# Altium PCB PCB1.PcbDoc (part 2 of 2)
Units mil, origin at the board's own origin, x right, y up, seen from the top; angles counter-clockwise.
Board outline 7474.71 x 6958.47 mil, 4 copper layers (PowerLayer1, PowerLayer2, GndLayer, SignalLayer), stack 30.635 mil thick; 145 components, 77 nets, 394 pads, 59 vias.
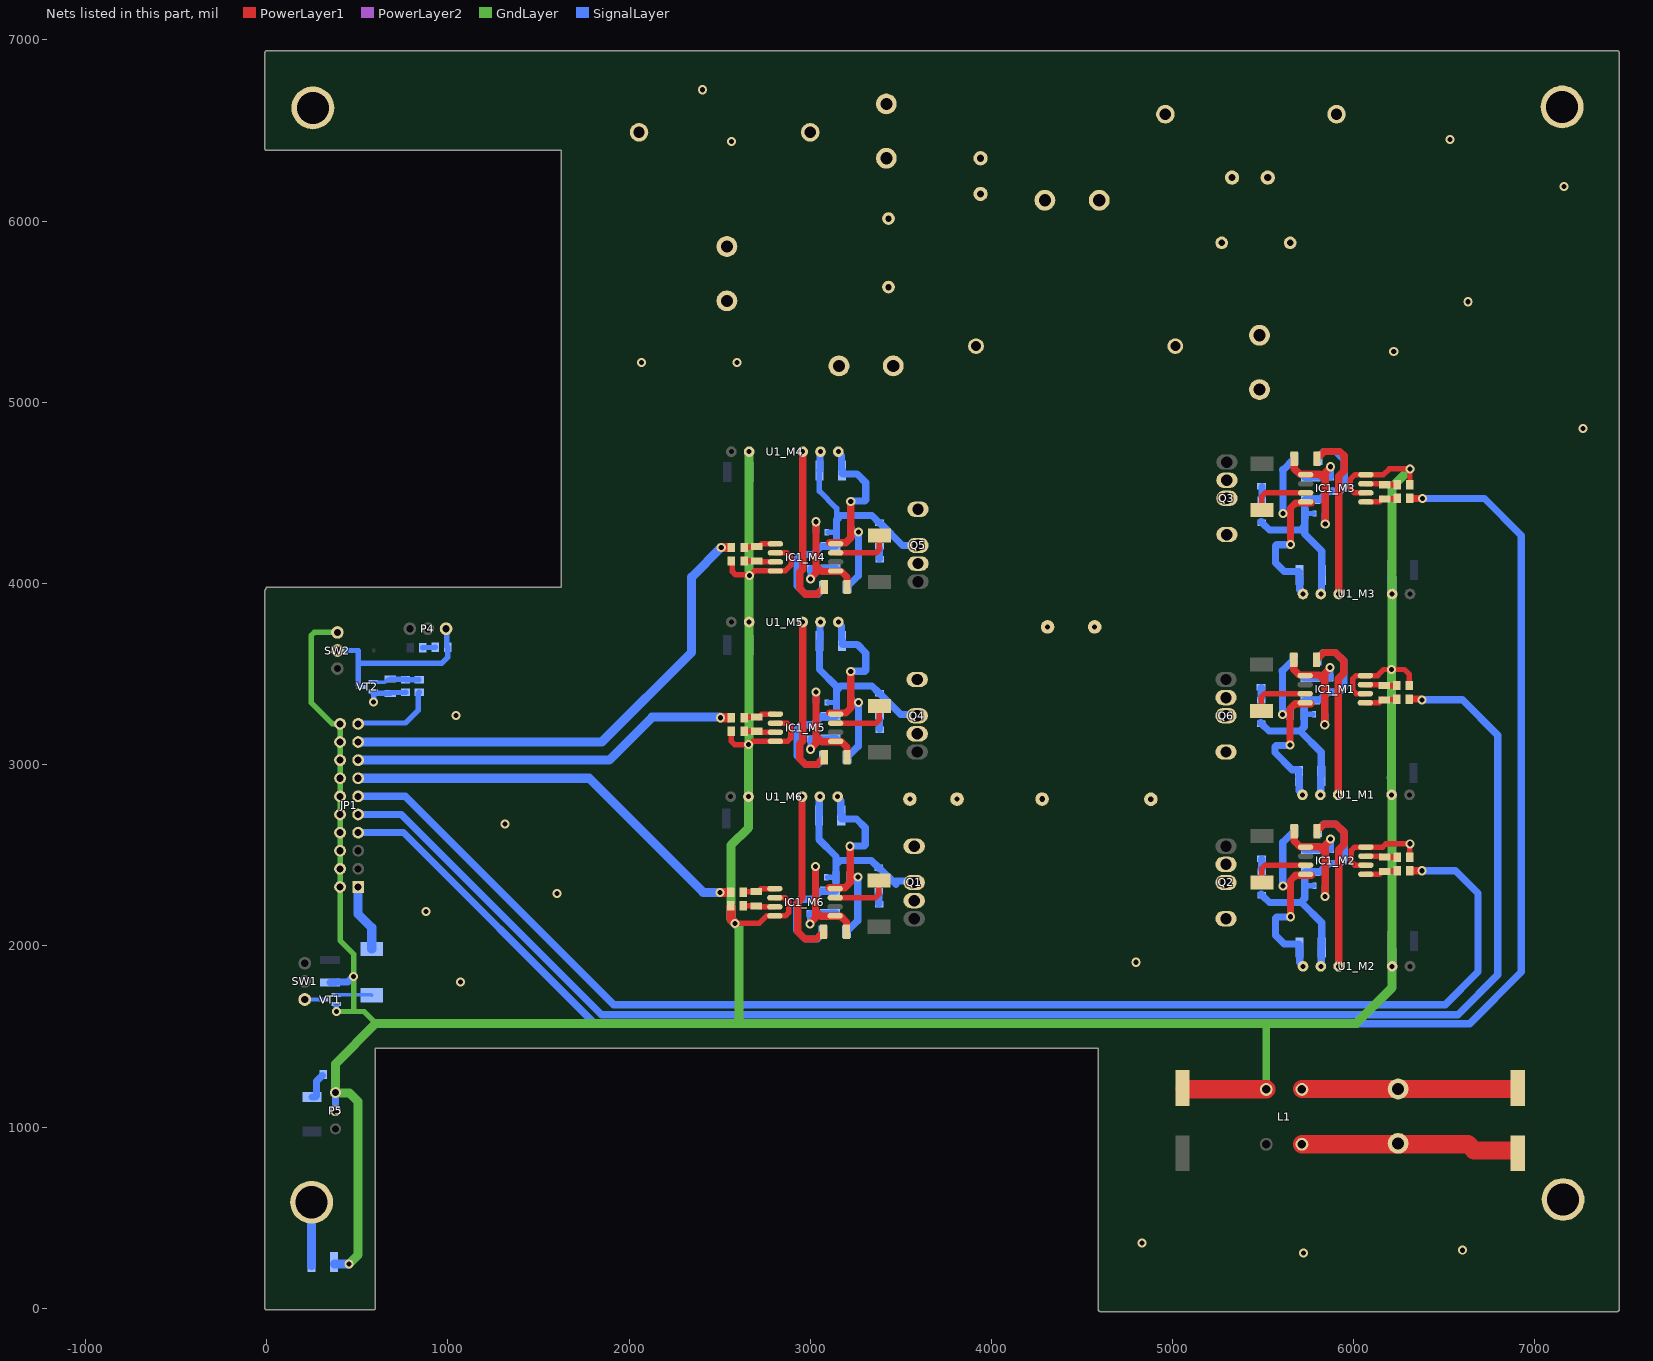
[diagram p4: the nets of this part, all layers, seen from the top]

## Via types
v1: diameter 50, hole 28, PowerLayer1 to SignalLayer, 59 vias

## Nets (pads, with @x,y where several pads share a name; then routed paths per layer and width w, separated by ;. In a path a pad name is that pad's centre, name@x,y a point inside that pad or via, vN(x,y) a via of type N, cw(c..) or ccw(c..) an arc to the next point about the centre after c; other vN are vias at no path point) (continued)
GND: C1.1 C2.2 C4.2 C5.2 C12_M1.2 C12_M2.2 C12_M3.2 C12_M4.2 C12_M5.2 C12_M6.2 IC1_M1.2 IC1_M1.4 IC1_M2.2 IC1_M2.4 IC1_M3.2 IC1_M3.4 IC1_M4.2 IC1_M4.4 IC1_M5.2 IC1_M5.4 IC1_M6.2 IC1_M6.4 JP1.2 JP1.4 JP1.6 JP1.8 JP1.10 JP1.12 JP1.14 JP1.16 JP1.18 JP1.20 L1.3 P5.2 P5.3 R7.1 R11_M1.1 R11_M2.1 R11_M3.1 R11_M4.1 R11_M5.1 R11_M6.1 SW2.3 U1_M1.2 U1_M2.2 U1_M3.2 U1_M4.2 U1_M5.2 U1_M6.2 VD1.2 VT1.3 VT2.3 | length 21396.9
  PowerLayer1 w30: R11_M5.1@2564.8,3184.27 2564.8,3127.83 2582.37,3110.25 v1(2659.54,3110.25) 2664.95,3110.25 2683.65,3128.95 IC1_M5.4@2807.74,3128.95 2874.73,3128.95 2892.3,3146.53 2892.3,3208.78 2872.17,3228.91 2807.78,3228.91 IC1_M5.2@2807.74,3228.95 ; R11_M4.1@2564.8,4124.32 2570.46,4118.65 2570.46,4065.19 2588.04,4047.62 2661.67,4047.62 v1(2665.5,4043.79) 2667.85,4043.79 2693.07,4069.01 2862.08,4069.01 2894.02,4100.94 2894.02,4145.08 2870.13,4168.97 2807.78,4168.97 IC1_M4.2@2807.74,4169.01 ; v1(2584.65,2124.01) 2717.44,2124.01 2758.87,2165.44 2863.51,2165.44 2881.08,2183.01 2881.08,2245.63 2861.31,2265.4 IC1_M6.2@2804.51,2265.44 IC1_M6.2@2804.51,2265.44 ; IC1_M2.2@6066.94,2444.92 6004.68,2444.92 5987.1,2462.49 5987.1,2527.31 6004.68,2544.88 IC1_M2.4@6066.94,2544.92 IC1_M2.4@6066.94,2544.92 6158.78,2544.92 6177.12,2563.25 v1(6310.34,2563.25) 6310.11,2563.03 6310.11,2489.83 R11_M2.1@6309.88,2489.61 ; IC1_M3.2@6067.06,4500.32 6067.02,4500.35 6003.35,4500.35 5979.46,4524.24 5979.46,4572.76 6007.02,4600.32 IC1_M3.4@6067.06,4600.32 6164.05,4600.32 6196.41,4632.68 v1(6310.67,4632.68) 6310.33,4632.35 6310.33,4545.33 R11_M3.1@6310,4545 ; R11_M1.1@6307.21,3436.37 6307.21,3498.02 6280.13,3525.1 6165.02,3525.1 6131.6,3491.68 6012.14,3491.68 5994.56,3474.11 5994.56,3409.3 6012.14,3391.72 IC1_M1.2@6064.23,3391.72 ; IC1_M1.2@6064.23,3391.72 IC1_M1.2@6064.26,3391.68
  PowerLayer1 w50: R11_M6.1@2561.57,2220.76 2561.57,2147.09 v1(2584.65,2124.01)
  PowerLayer1 w100: C4.2@5065.63,1208.15 L1.3@5516.89,1208.15
  GndLayer w30: v1(385.12,1637.57) 480,1637.57 ; SW2.3@390,3730 262.57,3730 245,3712.43 245,3342.57 362.48,3225.09 404.91,3225.09 JP1.20@405,3225 JP1.18@405,3125 JP1.16@405,3025 JP1.14@405,2925 JP1.12@405,2825 JP1.10@405,2725 JP1.8@405,2625 JP1.6@405,2525 JP1.4@405,2425 JP1.2@405,2325 405,2030 480,1955 v1(480,1830) 480,1637.57 ; 603.05,1571.95 537.43,1637.57 480,1637.57
  GndLayer w40: L1.3@5516.89,1207.6 5516.89,1571.95
  GndLayer w50: v1(455,245) 505,295 505,1140 457.49,1187.51 382.49,1187.51 P5.3@380,1190 380,1348.91 603.05,1571.95 2607.66,1571.95 ; U1_M4.2@2662.77,4725.86 U1_M5.2@2662.77,3787.17 2662.77,3113.48 v1(2659.54,3110.25) U1_M6.2@2659.54,2823.66 2659.54,2652.57 2561.63,2554.66 2561.63,2147.03 v1(2584.65,2124.01) 2607.66,2100.99 2607.66,1571.95 ; v1(6310.67,4632.68) 6212.03,4534.04 6212.03,3527.89 v1(6209.23,3525.1) 6209.23,2836.2 6211.97,2833.46 6211.97,1886.76 U1_M2.2@6211.91,1886.7 6211.91,1770 6013.87,1571.95 5516.89,1571.95 2607.66,1571.95
  SignalLayer w30: VT1.3@383.46,1669.88 383.46,1639.23 v1(385.12,1637.57) ; JP1.20@405,3225 JP1.20@409.81,3229.81 ; v1@591.61,3365 VT2.3@591.61,3393.58 ; R7.1@766.54,3399.68 765.15,3398.3 715.61,3398.3 715.57,3398.27 686.22,3398.27 C5.2@681.54,3393.58 VT2.3@591.61,3393.58 ; VT2.3@591.61,3393.58 591.61,3396.73 588.46,3393.58 VT2.3@591.61,3393.58
  SignalLayer w40: C2.2@350,1797.99 382.48,1797.99 385.12,1800.63 447.92,1800.63 477.29,1830 v1(480,1830) ; P5.2@380,1090 P5.3@380,1190 VD1.2@380,1282.2 ; U1_M6.2@2659.54,2823.66 2660.9,2822.29 2660.9,2730.75 C12_M6.2@2662.27,2729.38 ; U1_M5.2@2662.77,3787.17 2664.13,3785.81 2664.13,3694.26 C12_M5.2@2665.5,3692.89 ; U1_M4.2@2662.77,4727.23 2664.13,4725.86 2664.13,4634.31 C12_M4.2@2665.5,4632.95
  SignalLayer w50: C1.1@374.37,245 v1(455,245) ; C12_M1.2@6206.5,2927.74 6207.87,2926.38 6207.87,2834.83 U1_M1.2@6209.23,2833.46 ; C12_M3.2@6209.3,4036.38 6210.66,4035.01 6210.66,3943.46 U1_M3.2@6212.03,3942.1 ; C12_M2.2@6210.55,1979.62 6210.55,1888.07 U1_M2.2@6211.91,1886.7
  other v1: 588.46,3345
MS2: C13_M2.1 C14_M2.1 C16_M2.2 C17_M2.2 D4_M2.1 D6_M2.1 L2.1 Q2.2 Q2.3 Q3.1 R8_M2.2 R12_M2.1 U1_M2.6 | length 1447.1
  SignalLayer w30: C14_M2.1@5729.05,2330.82 R12_M2.1@5775.18,2330.82
  SignalLayer w40: D6_M2.1@5488.66,2281.12 D6_M2.1@5488.66,2284.98 ; D6_M2.1@5496.69,2276.95 5534.25,2239.39 D4_M2.1@5567.68,2239.39 5705.62,2239.39 ; R8_M2.2@5801.31,2632.82 5801.31,2641.68 5832.45,2672.82 5900.6,2672.82 5947.24,2626.19 5947.24,2477.24 5923.81,2453.81 C17_M2.2@5859.73,2453.81 5848.55,2453.81 5848.24,2453.49 5848.24,2442.31 5815.4,2409.48 5765.12,2409.48 C16_M2.2@5762.49,2406.84 5732,2406.84 5729.36,2404.2 5729.36,2331.13 C14_M2.1@5729.05,2330.82 5729.05,2262.82 5705.62,2239.39 ; U1_M2.6@5818.21,1886.7 5821.07,1889.56 5821.07,1987.74 C13_M2.1@5823.71,1990.38 5823.71,2127.19 5711.52,2239.39 5705.62,2239.39
MS3: C7-2.2 C8.2 C9-1.2 C13_M1.1 C13_M3.1 C14_M1.1 C14_M3.1 C16_M1.2 C16_M3.2 C17_M1.2 C17_M3.2 D4_M1.1 D4_M3.1 D6_M1.1 D6_M3.1 P1.1 P2.1 Q3.2 Q3.3 Q5.1 Q6.2 Q6.3 R1.1 R2.1 R8_M1.2 R8_M3.2 R12_M1.1 R12_M3.1 U1_M1.6 U1_M3.6 | length 2901.3
  SignalLayer w30: C14_M1.1@5726.37,3277.58 R12_M1.1@5772.51,3277.58 ; C14_M3.1@5729.16,4386.21 R12_M3.1@5775.3,4386.21
  SignalLayer w40: D6_M1.1@5485.98,3227.88 D6_M1.1@5485.98,3231.74 ; D6_M3.1@5488.78,4336.51 D6_M3.1@5488.78,4340.37 ; D6_M1.1@5494.02,3223.71 5531.57,3186.15 D4_M1.1@5565,3186.15 5702.94,3186.15 ; D6_M3.1@5496.81,4332.34 5534.37,4294.78 D4_M3.1@5567.79,4294.78 5705.73,4294.78 5729.16,4318.21 ; R8_M1.2@5798.63,3579.58 5798.63,3588.44 5829.77,3619.58 5897.93,3619.58 5944.56,3572.95 5944.56,3424 5921.13,3400.57 C17_M1.2@5857.05,3400.57 5845.87,3400.57 5845.56,3400.26 5845.56,3389.07 5812.72,3356.24 5762.45,3356.24 C16_M1.2@5759.81,3353.6 5729.32,3353.6 5726.68,3350.96 5726.68,3277.89 C14_M1.1@5726.37,3277.58 5726.37,3209.58 5702.94,3186.15 ; R8_M3.2@5801.42,4688.22 5801.42,4697.07 5832.56,4728.22 5900.72,4728.22 5947.36,4681.58 5947.36,4532.63 5923.92,4509.2 C17_M3.2@5859.85,4509.2 5848.67,4509.2 5848.35,4508.89 5848.35,4497.71 5815.52,4464.87 5765.24,4464.87 C16_M3.2@5762.6,4462.23 5732.12,4462.23 5729.48,4459.59 5729.48,4386.52 C14_M3.1@5729.16,4386.21 5729.16,4318.21 ; U1_M1.6@5815.53,2833.46 5818.39,2836.32 5818.39,2934.51 C13_M1.1@5821.03,2937.14 5821.03,3068.55 5703.43,3186.15 5702.94,3186.15 ; U1_M3.6@5818.33,3942.1 5821.19,3944.96 5821.19,4043.14 C13_M3.1@5823.82,4045.78 5823.82,4178.76 5729.16,4273.42 5729.16,4318.21
MS5: C6.2 C7.2 C9.2 C13_M4.1 C13_M5.1 C14_M4.1 C14_M5.1 C16_M4.2 C16_M5.2 C17_M4.2 C17_M5.2 D4_M4.1 D4_M5.1 D6_M4.1 D6_M5.1 Q4.2 Q4.3 Q5.2 Q5.3 R8_M4.2 R8_M5.2 R12_M4.1 R12_M5.1 U1_M4.6 U1_M5.6 | length 3441.3
  SignalLayer w30: C13_M4.1@3050.97,4623.55 3050.97,4509.15 3145.63,4414.49 3145.63,4351.11 ; R12_M5.1@3099.5,3343.06 C14_M5.1@3145.63,3343.06 ; R12_M4.1@3099.5,4283.11 C14_M4.1@3145.63,4283.11
  SignalLayer w40: C13_M4.1@3050.97,4623.55 3053.61,4626.18 3053.61,4724.37 U1_M4.6@3056.47,4727.23 ; U1_M5.6@3056.47,3787.17 3053.61,3784.31 3053.61,3686.13 C13_M5.1@3050.97,3683.49 3050.97,3524.67 3145.63,3430.01 3145.63,3411.06 ; R8_M5.2@3073.37,3041.05 3073.37,3032.19 3042.23,3001.05 2974.08,3001.05 2927.44,3047.69 2927.44,3196.63 2950.87,3220.07 C17_M5.2@3014.95,3220.07 3026.13,3220.07 3026.44,3220.38 3026.44,3231.56 3059.28,3264.4 3109.55,3264.4 C16_M5.2@3112.19,3267.04 3142.68,3267.04 3145.32,3269.67 3145.32,3342.74 C14_M5.1@3145.63,3343.06 3145.63,3411.06 ; R8_M4.2@3073.37,3981.11 3073.37,3972.25 3042.23,3941.11 2974.08,3941.11 2927.44,3987.74 2927.44,4136.69 2950.87,4160.12 C17_M4.2@3014.95,4160.12 3026.13,4160.12 3026.44,4160.43 3026.44,4171.62 3059.28,4204.45 3109.55,4204.45 C16_M4.2@3112.19,4207.09 3142.68,4207.09 3145.32,4209.73 3145.32,4282.8 C14_M4.1@3145.63,4283.11 3145.63,4351.11 3169.06,4374.54 D4_M4.1@3307,4374.54 3340.43,4374.54 3382.16,4332.81 3386.02,4332.81 3508.83,4210 Q5.2@3595,4210 ; D6_M5.1@3377.99,3396.93 3340.43,3434.49 D4_M5.1@3307,3434.49 3169.06,3434.49 3145.63,3411.06 ; D6_M5.1@3382,3394.84 3383.93,3394.84 3388.1,3390.67 3388.1,3388.74 3499.5,3277.35 3582.65,3277.35 Q4.2@3590,3270 ; D6_M5.1@3386.02,3388.9 D6_M5.1@3386.02,3392.76
MS6: C13_M6.1 C14_M6.1 C16_M6.2 C17_M6.2 D4_M6.1 D6_M6.1 P-Lf.2 Q1.2 Q1.3 Q4.1 R8_M6.2 R12_M6.1 U1_M6.6 | length 1739.6
  SignalLayer w30: R12_M6.1@3096.27,2379.55 C14_M6.1@3142.4,2379.55 ; Q1.3@3573.78,2245.63 Q1.3@3619.37,2245.63
  SignalLayer w40: U1_M6.6@3053.24,2823.66 3050.38,2820.8 3050.38,2722.62 C13_M6.1@3047.74,2719.98 3047.74,2588.02 3142.4,2493.36 3142.4,2447.54 ; R8_M6.2@3070.15,2077.54 3070.15,2068.68 3039,2037.54 2970.85,2037.54 2924.21,2084.18 2924.21,2233.12 2947.64,2256.55 C17_M6.2@3011.72,2256.55 3022.9,2256.55 3023.21,2256.87 3023.21,2268.05 3056.05,2300.88 3106.33,2300.88 C16_M6.2@3108.96,2303.52 3139.45,2303.52 3142.09,2306.16 3142.09,2379.23 C14_M6.1@3142.4,2379.55 3142.4,2447.54 ; D6_M6.1@3374.76,2433.42 3337.2,2470.97 D4_M6.1@3303.77,2470.97 3165.84,2470.97 3142.4,2447.54 ; D6_M6.1@3378.77,2431.33 3380.7,2431.33 D6_M6.1@3382.79,2429.24 ; D6_M6.1@3382.79,2425.38 D6_M6.1@3382.79,2429.24 ; 3474.05,2337.98 D6_M6.1@3382.79,2429.24 ; 3474.57,2358.14 3565.24,2358.14 Q1.2@3573.78,2349.6
NetC3_1: C3.1 L1.1 P3.1 | length 1170.8
  PowerLayer1 w100: L1.1@5713.74,905 6245,905 6630,905 6665,870 C3.1@6870,870
NetC3_2: C3.2 L1.2 P3.2 | length 1156.3
  PowerLayer1 w100: L1.2@5713.74,1209.96 P3.2@6245,1209.96 C3.2@6870,1209.96
NetC5_1: C5.1 R6.2 R7.2 VT2.1 | length 259.4
  SignalLayer w20: VT2.1@588.46,3455.28 652.68,3455.28 669.72,3472.32 C5.1@681.54,3472.32
  SignalLayer w30: C5.1@681.54,3472.32 682.85,3471 R7.2@766.54,3471 ; R7.2@766.56,3469.71 R6.2@840.19,3469.71
NetC6_1: C6.1 C7.1 C9.1 Q1.1 Q2.1 Q6.1
NetC7-2_1: C7-2.1 P-Lf.1 P-SSR.2
NetC13_M1_2: C13_M1.2 C14_M1.2 D4_M1.2 IC1_M1.8 R8_M1.1 U1_M1.7 | length 1121.6
  PowerLayer1 w40: v1(5648.4,3107.41) 5648.4,3307.91 5676.47,3335.97 IC1_M1.8@5764.07,3335.97
  SignalLayer w40: v1(5605.94,3276.47) 5606.5,3277.03 5647.31,3277.03 5647.63,3277.34 C14_M1.2@5647.63,3277.58 ; v1@5605.94,3279.18 5605.94,3516.9 ; v1(5648.4,3107.41) 5646.49,3105.49 5570.96,3105.49 D4_M1.2@5565,3099.53 5565,3066.52 5659.26,2972.26 5694.38,2972.26 5697.02,2969.62 C13_M1.2@5697.02,2954.19 ; R8_M1.1@5668.63,3579.58 5605.94,3516.9 ; C13_M1.2@5694.85,2934.98 5699.65,2930.17 5699.65,2856.08 5717.11,2838.62 U1_M1.7@5717.11,2833.46 ; 5605.94,3516.9 5605.2,3516.16 5605.2,3519.44 5605.94,3518.7 5605.94,3516.9
NetC13_M2_2: C13_M2.2 C14_M2.2 D4_M2.2 IC1_M2.8 R8_M2.1 U1_M2.7 | length 1148.6
  PowerLayer1 w40: v1(5651.08,2160.65) 5651.08,2361.15 5679.15,2389.21 IC1_M2.8@5766.75,2389.21
  SignalLayer w40: v1(5608.62,2329.71) 5609.17,2330.26 5649.99,2330.26 5650.31,2330.58 C14_M2.2@5650.31,2330.82 ; v1@5608.62,2332.42 5608.62,2570.14 ; v1(5651.08,2160.65) 5649.17,2158.73 5573.64,2158.73 D4_M2.2@5567.68,2152.77 5567.68,2058.24 5615.85,2010.07 5697.05,2010.07 C13_M2.2@5699.69,2007.43 ; R8_M2.1@5671.31,2632.82 5608.62,2570.14 ; C13_M2.2@5697.53,1988.22 5702.33,1983.41 5702.33,1909.31 5719.79,1891.86 U1_M2.7@5719.79,1886.7 ; 5608.62,2570.14 5607.88,2569.4 5607.88,2572.68 5608.62,2571.94 5608.62,2570.14
NetC13_M3_2: C13_M3.2 C14_M3.2 D4_M3.2 IC1_M3.8 R8_M3.1 U1_M3.7 | length 1148.6
  PowerLayer1 w40: v1(5651.2,4216.04) 5651.2,4416.54 5679.26,4444.61 IC1_M3.8@5766.86,4444.61
  SignalLayer w40: v1(5608.74,4385.11) 5609.29,4385.66 5650.11,4385.66 5650.42,4385.97 C14_M3.2@5650.42,4386.21 ; v1@5608.74,4387.81 5608.74,4625.53 ; v1(5651.2,4216.04) 5649.28,4214.13 5573.75,4214.13 D4_M3.2@5567.79,4208.17 5567.79,4113.63 5615.96,4065.46 5697.17,4065.46 C13_M3.2@5699.81,4062.82 ; R8_M3.1@5671.42,4688.22 5608.74,4625.53 ; C13_M3.2@5697.64,4043.61 5702.45,4038.81 5702.45,3964.71 5719.9,3947.25 U1_M3.7@5719.9,3942.1 ; 5608.74,4625.53 5608.74,4627.33 5608,4628.07 5608,4624.79 5608.74,4625.53
NetC13_M4_2: C13_M4.2 C14_M4.2 D4_M4.2 IC1_M4.8 R8_M4.1 U1_M4.7 | length 1148.6
  PowerLayer1 w40: IC1_M4.8@3107.93,4224.72 3195.53,4224.72 3223.6,4252.78 v1(3223.6,4453.28)
  SignalLayer w40: U1_M4.7@3154.89,4727.23 3154.89,4722.07 3172.35,4704.61 3172.35,4630.52 C13_M4.2@3177.15,4625.71 ; C13_M4.2@3174.99,4606.5 3177.62,4603.86 3258.83,4603.86 3307,4555.69 D4_M4.2@3307,4461.16 3301.04,4455.2 3225.51,4455.2 v1(3223.6,4453.28) ; R8_M4.1@3203.37,3981.11 3266.06,4043.79 ; C14_M4.2@3224.37,4283.11 3224.37,4283.35 3224.69,4283.66 3265.51,4283.66 v1(3266.06,4284.22) ; v1@3266.06,4281.51 3266.06,4043.79 ; 3266.06,4043.79 3266.06,4041.99 3266.8,4041.25 3266.8,4044.53 3266.06,4043.79
NetC13_M5_2: C13_M5.2 C14_M5.2 D4_M5.2 IC1_M5.8 R8_M5.1 U1_M5.7 | length 1148.6
  PowerLayer1 w40: IC1_M5.8@3107.93,3284.66 3195.53,3284.66 3223.6,3312.73 v1(3223.6,3513.23)
  SignalLayer w40: U1_M5.7@3154.89,3787.17 3154.89,3782.01 3172.35,3764.56 3172.35,3690.46 C13_M5.2@3177.15,3685.66 ; C13_M5.2@3174.99,3666.44 3177.62,3663.81 3258.83,3663.81 3307,3615.64 D4_M5.2@3307,3521.1 3301.04,3515.14 3225.51,3515.14 v1(3223.6,3513.23) ; R8_M5.1@3203.37,3041.05 3266.06,3103.74 ; C14_M5.2@3224.37,3343.06 3224.37,3343.3 3224.69,3343.61 3265.51,3343.61 v1(3266.06,3344.16) ; v1@3266.06,3341.46 3266.06,3103.74 ; 3266.06,3103.74 3266.8,3104.48 3266.8,3101.2 3266.06,3101.94 3266.06,3103.74
NetC13_M6_2: C13_M6.2 C14_M6.2 D4_M6.2 IC1_M6.8 R8_M6.1 U1_M6.7 | length 1148.6
  PowerLayer1 w40: IC1_M6.8@3104.71,2321.15 3192.3,2321.15 3220.37,2349.21 v1(3220.37,2549.72)
  SignalLayer w40: U1_M6.7@3151.67,2823.66 3151.67,2818.5 3169.12,2801.05 3169.12,2726.95 C13_M6.2@3173.92,2722.15 ; C13_M6.2@3171.76,2702.93 3174.4,2700.29 3255.6,2700.29 3303.77,2652.12 D4_M6.2@3303.77,2557.59 3297.81,2551.63 3222.28,2551.63 v1(3220.37,2549.72) ; R8_M6.1@3200.15,2077.54 3262.83,2140.22 ; C14_M6.2@3221.14,2379.55 3221.14,2379.78 3221.46,2380.1 3262.28,2380.1 v1(3262.83,2380.65) ; v1@3262.83,2377.94 3262.83,2140.22 ; 3262.83,2140.22 3262.83,2138.42 3263.57,2137.68 3263.57,2140.96 3262.83,2140.22
NetC15_M1_1: C15_M1.1 IC1_M1.1 R9_M1.2 | length 166.5
  PowerLayer1 w30: IC1_M1.1@6064.26,3341.68 6139.49,3341.72 C15_M1.1@6155.4,3357.63 ; C15_M1.1@6152,3358.58 C15_M1.1@6154.02,3360.61 ; C15_M1.1@6169.23,3359.66 R9_M1.2@6235.18,3359.66
NetC15_M1_2: C15_M1.2 IC1_M1.3 R11_M1.2 | length 155.8
  PowerLayer1 w30: IC1_M1.3@6064.26,3441.68 C15_M1.2@6150.08,3441.68 ; C15_M1.2@6167.21,3436.37 R11_M1.2@6237.21,3436.37
NetC15_M2_1: C15_M2.1 IC1_M2.1 R9_M2.2 | length 166.5
  PowerLayer1 w30: IC1_M2.1@6066.98,2394.96 6142.17,2394.96 C15_M2.1@6158.07,2410.87 ; C15_M2.1@6154.67,2411.82 C15_M2.1@6156.7,2413.85 ; C15_M2.1@6171.91,2412.89 R9_M2.2@6237.86,2412.89
NetC15_M2_2: C15_M2.2 IC1_M2.3 R11_M2.2 | length 155.8
  PowerLayer1 w30: IC1_M2.3@6066.94,2494.92 C15_M2.2@6152.76,2494.92 ; C15_M2.2@6169.88,2489.61 R11_M2.2@6239.88,2489.61
NetC15_M3_1: C15_M3.1 IC1_M3.1 R9_M3.2 | length 166.5
  PowerLayer1 w30: IC1_M3.1@6067.1,4450.35 6142.28,4450.35 C15_M3.1@6158.19,4466.26 ; C15_M3.1@6154.79,4467.21 C15_M3.1@6156.82,4469.24 ; C15_M3.1@6172.03,4468.29 R9_M3.2@6237.97,4468.29
NetC15_M3_2: C15_M3.2 IC1_M3.3 R11_M3.2 | length 155.8
  PowerLayer1 w30: IC1_M3.3@6067.06,4550.32 C15_M3.2@6152.87,4550.32 ; C15_M3.2@6170,4545 R11_M3.2@6240,4545
NetC15_M4_1: C15_M4.1 IC1_M4.1 R9_M4.2 | length 166.5
  PowerLayer1 w30: R9_M4.2@2636.82,4201.03 C15_M4.1@2702.77,4201.03 ; C15_M4.1@2716.61,4203.06 2732.51,4218.97 IC1_M4.1@2807.74,4219.01 ; C15_M4.1@2717.98,4200.08 C15_M4.1@2720.01,4202.11
NetC15_M4_2: C15_M4.2 IC1_M4.3 R11_M4.2 | length 155.8
  PowerLayer1 w30: R11_M4.2@2634.8,4124.32 C15_M4.2@2704.8,4124.32 ; C15_M4.2@2721.92,4119.01 IC1_M4.3@2807.74,4119.01
NetC15_M5_1: C15_M5.1 IC1_M5.1 R9_M5.2 | length 166.5
  PowerLayer1 w30: R9_M5.2@2636.82,3260.98 C15_M5.1@2702.77,3260.98 ; C15_M5.1@2716.61,3263.01 2732.51,3278.91 IC1_M5.1@2807.7,3278.91 ; C15_M5.1@2717.98,3260.03 C15_M5.1@2720.01,3262.06
NetC15_M5_2: C15_M5.2 IC1_M5.3 R11_M5.2 | length 155.8
  PowerLayer1 w30: R11_M5.2@2634.8,3184.27 C15_M5.2@2704.8,3184.27 ; C15_M5.2@2721.92,3178.95 IC1_M5.3@2807.74,3178.95
NetC15_M6_1: C15_M6.1 IC1_M6.1 R9_M6.2 | length 166.5
  PowerLayer1 w30: R9_M6.2@2633.59,2297.47 C15_M6.1@2699.54,2297.47 ; C15_M6.1@2713.38,2299.5 2729.28,2315.4 IC1_M6.1@2804.51,2315.44 ; C15_M6.1@2714.75,2296.51 C15_M6.1@2716.78,2298.54
NetC15_M6_2: C15_M6.2 IC1_M6.3 R11_M6.2 | length 155.8
  PowerLayer1 w30: R11_M6.2@2631.57,2220.76 C15_M6.2@2701.57,2220.76 ; C15_M6.2@2718.69,2215.44 IC1_M6.3@2804.51,2215.44
NetC16_M1_1: C16_M1.1 C17_M1.1 D3_M1.2 IC1_M1.5 R12_M1.2 | length 847.3
  PowerLayer1 w40: D3_M1.2@5668.63,3579.58 5668.94,3579.27 5668.94,3525.1 5699.9,3494.14 5729.13,3494.14 5809.12,3494.14 5839.65,3463.61 ; v1(5839.65,3220.11) 5839.65,3463.61 ; v1(5869.86,3535.69) 5869.86,3532.98 5839.65,3502.77 5839.65,3463.61
  SignalLayer w25: R12_M1.2@5839.65,3277.58 R12_M1.2@5839.65,3285.69
  SignalLayer w40: C16_M1.1@5724.69,3481.04 5724.69,3480.25 5727.33,3477.62 C16_M1.1@5759.81,3477.62 5761.19,3479 5856.74,3479 C17_M1.1@5857.05,3479.31 5867.63,3479.31 5867.95,3479.63 5867.95,3533.77 v1(5869.86,3535.69) ; v1(5839.65,3220.11) R12_M1.2@5839.65,3277.58
NetC16_M2_1: C16_M2.1 C17_M2.1 D3_M2.2 IC1_M2.5 R12_M2.2 | length 847.3
  PowerLayer1 w40: D3_M2.2@5671.31,2632.82 5671.62,2632.51 5671.62,2578.34 5702.58,2547.38 5731.81,2547.38 5811.8,2547.38 5842.33,2516.85 ; v1(5842.33,2273.35) 5842.33,2516.85 ; v1(5872.54,2588.93) 5872.54,2586.22 5842.33,2556.01 5842.33,2516.85
  SignalLayer w25: R12_M2.2@5842.33,2330.82 R12_M2.2@5842.33,2338.93
  SignalLayer w40: C16_M2.1@5727.37,2534.28 5727.37,2533.49 5730.01,2530.85 C16_M2.1@5762.49,2530.85 5763.87,2532.23 5859.42,2532.23 C17_M2.1@5859.73,2532.55 5870.31,2532.55 5870.62,2532.86 5870.62,2587.01 v1(5872.54,2588.93) ; v1(5842.33,2273.35) R12_M2.2@5842.33,2330.82
NetC16_M3_1: C16_M3.1 C17_M3.1 D3_M3.2 IC1_M3.5 R12_M3.2 | length 847.3
  PowerLayer1 w40: D3_M3.2@5671.42,4688.22 5671.74,4687.9 5671.74,4633.73 5702.69,4602.77 5731.92,4602.77 5811.92,4602.77 5842.45,4572.24 ; v1(5842.45,4328.75) 5842.45,4572.24 ; v1(5872.65,4644.32) 5872.65,4641.61 5842.45,4611.41 5842.45,4572.24
  SignalLayer w25: R12_M3.2@5842.45,4386.21 R12_M3.2@5842.45,4394.32
  SignalLayer w40: C16_M3.1@5727.48,4589.68 5727.48,4588.89 5730.12,4586.25 C16_M3.1@5762.6,4586.25 5763.98,4587.63 5859.53,4587.63 C17_M3.1@5859.85,4587.94 5870.43,4587.94 5870.74,4588.26 5870.74,4642.41 v1(5872.65,4644.32) ; v1(5842.45,4328.75) R12_M3.2@5842.45,4386.21
NetC16_M4_1: C16_M4.1 C17_M4.1 D3_M4.2 IC1_M4.5 R12_M4.2 | length 847.3
  PowerLayer1 w40: v1(3002.14,4025) 3002.14,4027.71 3032.35,4057.92 3032.35,4097.08 ; v1(3032.35,4340.58) 3032.35,4097.08 ; D3_M4.2@3203.37,3981.11 3203.06,3981.42 3203.06,4035.59 3172.1,4066.55 3142.87,4066.55 3062.88,4066.55 3032.35,4097.08
  SignalLayer w25: R12_M4.2@3032.35,4275 R12_M4.2@3032.35,4283.11
  SignalLayer w40: v1(3002.14,4025) 3004.05,4026.92 3004.05,4081.06 3004.37,4081.38 C17_M4.1@3014.95,4081.38 3015.26,4081.69 3110.81,4081.69 C16_M4.1@3112.19,4083.07 3144.67,4083.07 3147.31,4080.44 C16_M4.1@3147.31,4079.65 ; R12_M4.2@3032.35,4283.11 v1(3032.35,4340.58)
NetC16_M5_1: C16_M5.1 C17_M5.1 D3_M5.2 IC1_M5.5 R12_M5.2 | length 847.3
  PowerLayer1 w40: v1(3002.14,3084.95) 3002.14,3087.65 3032.35,3117.86 3032.35,3157.02 ; v1(3032.35,3400.52) 3032.35,3157.02 ; D3_M5.2@3203.37,3041.05 3203.06,3041.37 3203.06,3095.54 3172.1,3126.5 3142.87,3126.5 3062.88,3126.5 3032.35,3157.02
  SignalLayer w25: R12_M5.2@3032.35,3334.95 R12_M5.2@3032.35,3343.06
  SignalLayer w40: v1(3002.14,3084.95) 3004.05,3086.86 3004.05,3141.01 3004.37,3141.33 C17_M5.1@3014.95,3141.33 3015.26,3141.64 3110.81,3141.64 C16_M5.1@3112.19,3143.02 3144.67,3143.02 3147.31,3140.38 C16_M5.1@3147.31,3139.59 ; R12_M5.2@3032.35,3343.06 v1(3032.35,3400.52)
NetC16_M6_1: C16_M6.1 C17_M6.1 D3_M6.2 IC1_M6.5 R12_M6.2 | length 847.3
  PowerLayer1 w40: v1(2998.91,2121.44) 2998.91,2124.14 3029.12,2154.35 3029.12,2193.51 ; v1(3029.12,2437.01) 3029.12,2193.51 ; D3_M6.2@3200.15,2077.54 3199.83,2077.85 3199.83,2132.02 3168.87,2162.98 3139.64,2162.98 3059.65,2162.98 3029.12,2193.51
  SignalLayer w25: R12_M6.2@3029.12,2371.44 R12_M6.2@3029.12,2379.55
  SignalLayer w40: v1(2998.91,2121.44) 3000.83,2123.35 3000.83,2177.5 3001.14,2177.81 C17_M6.1@3011.72,2177.81 3012.03,2178.13 3107.58,2178.13 C16_M6.1@3108.96,2179.51 3141.44,2179.51 3144.08,2176.87 C16_M6.1@3144.08,2176.08 ; R12_M6.2@3029.12,2379.55 v1(3029.12,2437.01)
NetD1_1: D1.1 R5.2 | length 69.6
  SignalLayer w30: R5.2@861.18,3645.75 862.09,3646.66 929.09,3646.66 D1.1@930,3647.57
NetD1_2: D1.2 D2.1 P4.3 SW2.2 VT2.2 | length 991.4
  SignalLayer w30: SW2.2@390,3630 D2.1@505,3630 505,3565 ; VT2.2@515.12,3429.68 505,3439.8 505,3565 ; P4.3@990,3750 995,3745 995,3652.57 D1.2@1000,3647.57 1000,3593.05 966.95,3560 510,3560 505,3565
NetD3_M1_1: D3_M1.1 U1_M1.5 | length 949.2
  PowerLayer1 w40: D3_M1.1@5794.61,3579.58 5794.61,3598.64 5794.93,3598.95 5813.98,3598.95 5834.61,3619.58 5897.93,3619.58 5944.56,3572.95 5944.56,3505.1 5913.96,3474.5 U1_M1.5@5913.96,2833.46
NetD3_M2_1: D3_M2.1 U1_M2.5 | length 949.2
  PowerLayer1 w40: D3_M2.1@5797.29,2632.82 5797.29,2651.88 5797.6,2652.19 5816.66,2652.19 5837.29,2672.82 5900.6,2672.82 5947.24,2626.19 5947.24,2560.79 5916.64,2530.19 U1_M2.5@5916.64,1886.7
NetD3_M3_1: D3_M3.1 U1_M3.5 | length 962.7
  PowerLayer1 w40: D3_M3.1@5797.41,4688.22 5797.41,4707.27 5797.72,4707.59 5816.78,4707.59 5837.41,4728.22 5923.92,4728.22 5947.36,4704.78 5947.36,4621.81 5916.75,4591.2 U1_M3.5@5916.75,3942.1
NetD3_M4_1: D3_M4.1 U1_M4.5 | length 937
  PowerLayer1 w40: U1_M4.5@2958.04,4727.23 2958.04,4078.12 2942.14,4062.22 2942.14,3973.04 2974.08,3941.11 3037.39,3941.11 3058.02,3961.74 3077.07,3961.74 3077.39,3962.05 D3_M4.1@3077.39,3981.11
NetD3_M5_1: D3_M5.1 U1_M5.5 | length 937
  PowerLayer1 w40: U1_M5.5@2958.04,3787.17 2958.04,3131.7 2942.14,3115.8 2942.14,3032.99 2974.08,3001.05 3037.39,3001.05 3058.02,3021.68 3077.07,3021.68 3077.39,3022 D3_M5.1@3077.39,3041.05
NetD3_M6_1: D3_M6.1 U1_M6.5 | length 943.5
  PowerLayer1 w40: U1_M6.5@2954.81,2823.66 2954.81,2263.72 2931.08,2239.99 2931.08,2077.3 2970.85,2037.54 3034.16,2037.54 3054.79,2058.17 3073.85,2058.17 3074.16,2058.48 D3_M6.1@3074.16,2077.54
NetD5_M1_2: D5_M1.2 D6_M1.2 | length 56.9
  SignalLayer w40: D6_M1.2@5490,3368.36 D5_M1.2@5490,3425.23
NetD5_M2_2: D5_M2.2 D6_M2.2 | length 56.9
  SignalLayer w40: D6_M2.2@5492.68,2421.6 D5_M2.2@5492.68,2478.46
NetD5_M3_2: D5_M3.2 D6_M3.2 | length 56.9
  SignalLayer w40: D6_M3.2@5492.79,4477 D5_M3.2@5492.79,4533.86
NetD5_M4_2: D5_M4.2 D6_M4.2 | length 56.9
  SignalLayer w40: D5_M4.2@3382,4135.46 D6_M4.2@3382,4192.33
NetD5_M5_2: D5_M5.2 D6_M5.2 | length 56.9
  SignalLayer w40: D5_M5.2@3382,3195.41 D6_M5.2@3382,3252.27
NetD5_M6_2: D5_M6.2 D6_M6.2 | length 56.9
  SignalLayer w40: D5_M6.2@3378.77,2231.9 D6_M6.2@3378.77,2288.76
NetFUDC_2: FUDC.2 P1.2
NetFUG_1: FUG.1 P-SSR.1 R2.2
NetFUG_2: FUG.2 P2.2
NetIC1_M1_7: IC1_M1.7 R10_M1.1 | length 326.5
  PowerLayer1 w30: R10_M1.1@5490,3296.51 5490,3374.11 5507.57,3391.68 IC1_M1.7@5731.59,3391.68
NetIC1_M2_7: IC1_M2.7 R10_M2.1 | length 326.5
  PowerLayer1 w30: R10_M2.1@5492.68,2349.75 5492.68,2427.35 5510.25,2444.92 IC1_M2.7@5734.26,2444.92
NetIC1_M3_7: IC1_M3.7 R10_M3.1 | length 326.5
  PowerLayer1 w30: R10_M3.1@5492.79,4405.15 5492.79,4482.74 5510.37,4500.32 IC1_M3.7@5734.38,4500.32
NetIC1_M4_7: IC1_M4.7 R10_M4.1 | length 326.5
  PowerLayer1 w30: IC1_M4.7@3140.41,4169.01 3364.43,4169.01 3382,4186.58 R10_M4.1@3382,4264.18
NetIC1_M5_7: IC1_M5.7 R10_M5.1 | length 326.5
  PowerLayer1 w30: IC1_M5.7@3140.41,3228.95 3364.43,3228.95 3382,3246.53 R10_M5.1@3382,3324.12
NetIC1_M6_7: IC1_M6.7 R10_M6.1 | length 326.5
  PowerLayer1 w30: IC1_M6.7@3137.19,2265.44 3361.2,2265.44 3378.77,2283.01 R10_M6.1@3378.77,2360.61
NetR3_2: R3.2 VT1.1 | length 197.5
  SignalLayer w20: VT1.1@383.46,1729.29 577.76,1729.29 R3.2@580,1727.05
NetR4_2: R4.2 VD1.1 | length 153.4
  SignalLayer w40: R4.2@250,1165 267.05,1165 274.61,1172.56 274.61,1252.56 306.46,1284.41 VD1.1@307.13,1284.41
NetSW1_1: SW1.1 VT1.2 | length 106.5
  SignalLayer w20: SW1.1@210,1703.7 VT1.2@316.54,1703.7
PE: C1.2 pad.0 pad.1 pad.2 | length 369.1
  PowerLayer2 w100: pad.0@239.45,593.7 pad.0@248.15,585 ; pad.0@7150,6630 pad.0@7152.5,6627.5 ; pad.0@7152.5,602.5 pad.0@7155,600
  SignalLayer w50: C1.2@248.15,235.31 pad.0@248.15,585
  other v1: 5721.61,305 6600.7,320 4830,360 1070,1800.63 4797.55,1909.31 880,2190 1603.28,2288.06 1314.84,2673.35 1046.06,3271.94 7265,4854.91 2068.31,5220.53 2595.06,5220.53 6220.53,5279.24 6630,5555 7160,6190 2565.35,6438.46 6530,6450 2405.66,6725
SIG+1: JP1.9 R9_M1.1 | length 8731.8
  PowerLayer1 w40: R9_M1.1@6307.21,3361.68 6370.85,3361.68 6374.91,3357.63 v1(6377.62,3357.63)
  SignalLayer w40: JP1.9@505,2725 742.89,2725 1847.89,1620 6575,1620 6795,1840 6795,3162.84 6600.21,3357.63 v1(6377.62,3357.63)
SIG+2: JP1.11 R9_M2.1 | length 7593.4
  PowerLayer1 w40: R9_M2.1@6309.88,2414.92 6310.2,2414.6 6377.3,2414.6 v1(6377.62,2414.29)
  SignalLayer w40: JP1.11@505,2825 765,2825 1915,1675 6505,1675 6685,1855 6685,2291.15 6561.86,2414.29 v1(6377.62,2414.29)
SIG+3: JP1.7 R9_M3.1 | length 10085.5
  PowerLayer1 w40: R9_M3.1@6310,4470.32 6310,4469.91 6310.67,4469.24 v1(6380,4469.24)
  SignalLayer w40: JP1.7@505,2625 755,2625 1810,1570 6640,1570 6925,1855 6925,4265.32 6721.07,4469.24 v1(6380,4469.24)
SIG+4: JP1.17 R9_M4.1 | length 2730.8
  PowerLayer1 w50: v1(2509,4199.01) R9_M4.1@2548.14,4199.01
  SignalLayer w50: JP1.17@505,3125 1849.47,3125 2345,3620.52 2345,4035 v1(2509,4199.01)
SIG+5: JP1.15 R9_M5.1 | length 2142.7
  PowerLayer1 w50: v1(2504.97,3258.82) 2548,3258.82 R9_M5.1@2548.14,3258.95
  SignalLayer w50: JP1.15@505,3025 1890,3025 2127.06,3262.06 2501.73,3262.06 v1(2504.97,3258.82)
SIG+6: JP1.13 R9_M6.1 | length 2303.4
  PowerLayer1 w50: v1(2501.63,2295.44) R9_M6.1@2547.62,2295.44
  SignalLayer w50: JP1.13@505,2925 1780,2925 2409.56,2295.44 v1(2501.63,2295.44)
SIG+9: JP1.1 R3.1 | length 373.1
  SignalLayer w50: JP1.1@505,2325 505,2175 580,2100 R3.1@580,1982.95
SIG+10: JP1.19 R6.1 | length 464.6
  SignalLayer w30: JP1.19@505,3225 509.72,3229.72 766.26,3229.72 835.5,3298.96 835.5,3394.02 841.17,3399.69 R6.1@841.54,3399.69
Vin1: C8.1 C9-1.1 FUDC.1 L2.2 R1.2
pads on no net: JP1.3 JP1.5 P4.2 SW1.2 SW2.1

## Polygon pours and split planes (outlines as drawn)
NetFUG_2 on PowerLayer1 "NETFUG_2_L01_P377" (solid, pour order 377): 2335,6609.38 1840,6607.01 1840,5395 2630,5395 2630,5660 2339.98,5660 2339.98,6485.02 2335,6490
NetC7-2_1 on PowerLayer1 "NETC7-2_1_L01_P378" (solid, pour order 378): 3569.07,6447.5 3262.03,6447.5 3020,6205.47 3020,5088.43 3271.85,5088.43 3271.85,5380 3582.14,5380
NetFUDC_2 on PowerLayer1 "NETFUDC_2_L01_P376" (solid, pour order 376): 5120.52,6890 4115,6890 4115,6005 4420,6005 4420,6295 4430.06,6305.06 5113.79,6305.06 5115,6303.84
Vin1 on PowerLayer1 "VIN1_L01_P375" (solid, pour order 375): 6008.16,6885 5485,6885 5485,5535 4935,5535 4935,5223.43 6008.16,5223.43
NetFUG_1 on PowerLayer1 "PowerLayer1-NetFUG_1" (solid, pour order 393): 3245.33,6510 3640,6510 3855,6295 4035,6295 4035,6890 2805,6890 2805,6293.15 3028.48,6293.15
MS2 on PowerLayer1 "PowerLayer2-MS2" (solid, pour order 374): 4475,2380.87 4590.82,2265.06 5356.12,2265.06 5356.12,2489.17 5163.62,2489.17 5136.12,2516.67 5136.12,4044.75 5192.52,4117.26 5386.12,4117.26 5386.12,4334.75 5136.12,4334.75 5136.12,4829.75 5204.18,4907.81 5566.12,4907.81 5566.12,5134.75 4475,5134.75
MS6 on PowerLayer1 "PowerLayer2-MS6" (solid, pour order 367): 4218.78,2200 4223.78,2490.39 4455,2490.39 4455,5280 3375,5280 3375,5039.3 3745,4721.21 3745,3615.64 3515,3615.64 3515,3408.82 3670,3408.82 3670,2397.54 3495,2397.54 3495,2211.16
PE on PowerLayer1 "PowerLayer1-PE" (solid, remove dead copper, pour order 411): 4600,-8.75 7455,-8.75 7455,1545 7455,6930 0,6930 0,6400 1635,6400 1635,3969.86 0.08,3969.86 0,0 0.63,0.63 590,0.63 590,1445 615.33,1470.33 4600,1470.33
MS5 on PowerLayer2 "MS5_L02_P362" (solid, pour order 362): 4355,4258.92 4355,2774.06 3745,2774.06 3745,3127.39 3523.78,3127.39 3523.78,3320.54 3715,3320.54 3715,4072.31 3515.34,4072.31 3515.34,4258.92
NetC6_1 on PowerLayer2 "PowerLayer2-NetC6_1" (solid, pour order 395): 4243.78,2201.22 4350,2095 5390,2095 5390,2225 5180,2225 5136.12,2268.88 5136.12,2913.98 5370,2913.98 5370,3145 4617.24,3145 4617.24,3842.45 4440,3842.45 4440,2692.17 3634.39,2692.17 3634.39,2878.54 3498.78,2878.54 3498.78,2500 4243.78,2500
MS3 on PowerLayer2 "PowerLayer2-MS3" (solid, pour order 390): 3515.34,4868.9 3515.34,4350.39 4695.16,4350.39 4695.16,3413.84 4908.84,3413.84 4908.84,3215 5375,3215 5375,3413.84 5215,3413.84 5215,4409.13 5359.68,4409.13 5359.68,4610.39 5194.13,4610.39 5194.13,4875 5800,4875 5800,5223.43 6008.16,5223.43 6008.16,6890 1795,6890 1795,5126.69 2879.65,5140.34 2879.65,4883.26 2894.02,4868.9
PE on PowerLayer2 "PowerLayer2-PE" (solid, remove dead copper, pour order 417): 0.08,1.18 0.63,0.63 590,0.63 590,1445 590.32,1444.68 4600,1444.68 4600,-8.75 7455,-8.75 7455,6930 0,6930 0,6400 1635,6400 1635,3969.86 0.08,3969.86
MS5 on GndLayer "MS5_L03_P408" (solid, pour order 408): 3382.87,4829.59 2897.3,4829.59 2897.3,4320.89 2897.3,3910 3552.75,3910 3678.11,4035.36 3678.11,4280 3527.32,4280 3382.87,4424.46
MS5 on GndLayer "MS5_L03_P409" (solid, pour order 409): 3377.87,3850 2892.3,3850 2892.3,3380.89 2892.3,2970 3523.11,2970 3673.11,3120 3673.11,3340 3522.32,3340 3377.87,3484.46
MS6 on GndLayer "MS6_L03_P418" (solid, pour order 418): 3361.65,2892.45 2876.08,2892.45 2876.08,2456.52 2876.08,2010 3656.89,2010 3656.89,2205.58 3656.89,2397.54 3524.19,2397.54 3361.65,2560.09
MS3 on GndLayer "MS3_L03_P419" (solid, pour order 419): 5194.13,4411.21 5350.88,4411.21 5511.09,4251 5766.86,3995.23 5766.86,3885 5976.67,3885 5976.67,4770 5214.13,4770 5194.13,4770
MS3 on GndLayer "MS3_L03_P420" (solid, pour order 420): 5189.13,3211.21 5342.83,3212.83 5762.8,2898.35 5762.8,2779.56 5971.67,2779.56 5971.67,3649.11 5189.13,3649.11
MS2 on GndLayer "MS2_L03_P421" (solid, pour order 421): 5189.13,2290.81 5342.83,2292.42 5762.8,1977.95 5762.8,1824.32 5971.67,1824.32 5971.67,2692.17 5189.13,2692.17
PE on GndLayer "PE_L03_P423" (solid, remove dead copper, pour order 423): 9.86,-8.99 9.86,6930.24 7464.86,6930.24 7464.86,-8.99
GND on GndLayer "GND_L03_P422" (solid, remove dead copper, pour order 422): 6170.78,4684.32 6170.77,3875 6170.78,3286.37 6170.78,3061.61 6170.78,2469.92 6170.78,1750 2745.08,1750 2745.08,2436.23 2745.08,3276.95 2745.08,3563.81 2745.08,3875 2745.08,4584.86 2745.08,4800 2220,4800 2220,3964.33 205,3960.42 205,940 393.81,940 393.81,190.04 550,190.04 550,1435 655,1519.84 675.16,1519.84 5385,1519.84 5385,1140.46 5879.09,1140.46 5879.09,1545 7005,1545 7005,4684.32
PE on SignalLayer "SignalLayer-PE" (solid, remove dead copper, shelved, pour order 407): 0,0.31 595,0.31 595,1444.68 4600,1444.68 4600,-9.08 7455,-9.08 7455,6930 0,6930 0,6405 1635,6405 1635,4664.67 1635,3969.54 0,3969.54

## Keep-outs
Keep-Out Layer:
  lines w10: -1070,555 -1070,555
  lines w19.68: 0,0 0,3969.78 ; 0,0.63 590,0.63 590,1445 4600,1445 4600,-8.75 7455,-8.75 7455,6930 6600,6930 0,6930 0,6405 1635,6405 1635,3969.86 0.08,3969.86

## Silkscreen, mask and mechanical layers (free items; w line width, h text height)
Top Overlay:
  drawing of 641 lines, arcs and shapes, not listed

## Text inside footprints (layer, text, board x,y; h text height)
C3: Top Overlay "+" at 6935,705 h60 r90
C4: Top Overlay "+" at 5085,705 h60 r90
JP1: Top Overlay "1" at 595,2265 h33.46 r90
Q1: Top Overlay "G" at 3558.78,2099.6 h23.11 r270; Top Overlay "D" at 3558.78,2624.6 h23.11 r270; Top Overlay "S" at 3563.78,2419.6 h23.11 r270
Q2: Top Overlay "G" at 5310,2599.6 h23.11 r90; Top Overlay "D" at 5310,2074.6 h23.11 r90; Top Overlay "S" at 5305,2279.6 h23.11 r90
Q3: Top Overlay "G" at 5315,4720 h23.11 r90; Top Overlay "D" at 5315,4195 h23.11 r90; Top Overlay "S" at 5310,4400 h23.11 r90
Q4: Top Overlay "S" at 3580,3340 h23.11 r270; Top Overlay "D" at 3575,3545 h23.11 r270; Top Overlay "G" at 3575,3020 h23.11 r270
Q5: Top Overlay "G" at 3580,3960 h23.11 r270; Top Overlay "D" at 3580,4485 h23.11 r270; Top Overlay "S" at 3585,4280 h23.11 r270
Q6: Top Overlay "G" at 5310,3520 h23.11 r90; Top Overlay "D" at 5310,2995 h23.11 r90; Top Overlay "S" at 5305,3200 h23.11 r90